# Altium PCB MotorsAdapter.PcbDoc
Units mil, origin at the board's own origin, x right, y up, seen from the top; angles counter-clockwise.
Board outline 6000 x 4000 mil, 2 copper layers (Top Layer, Bottom Layer); 10 components, 6 nets, 28 pads, 0 vias.
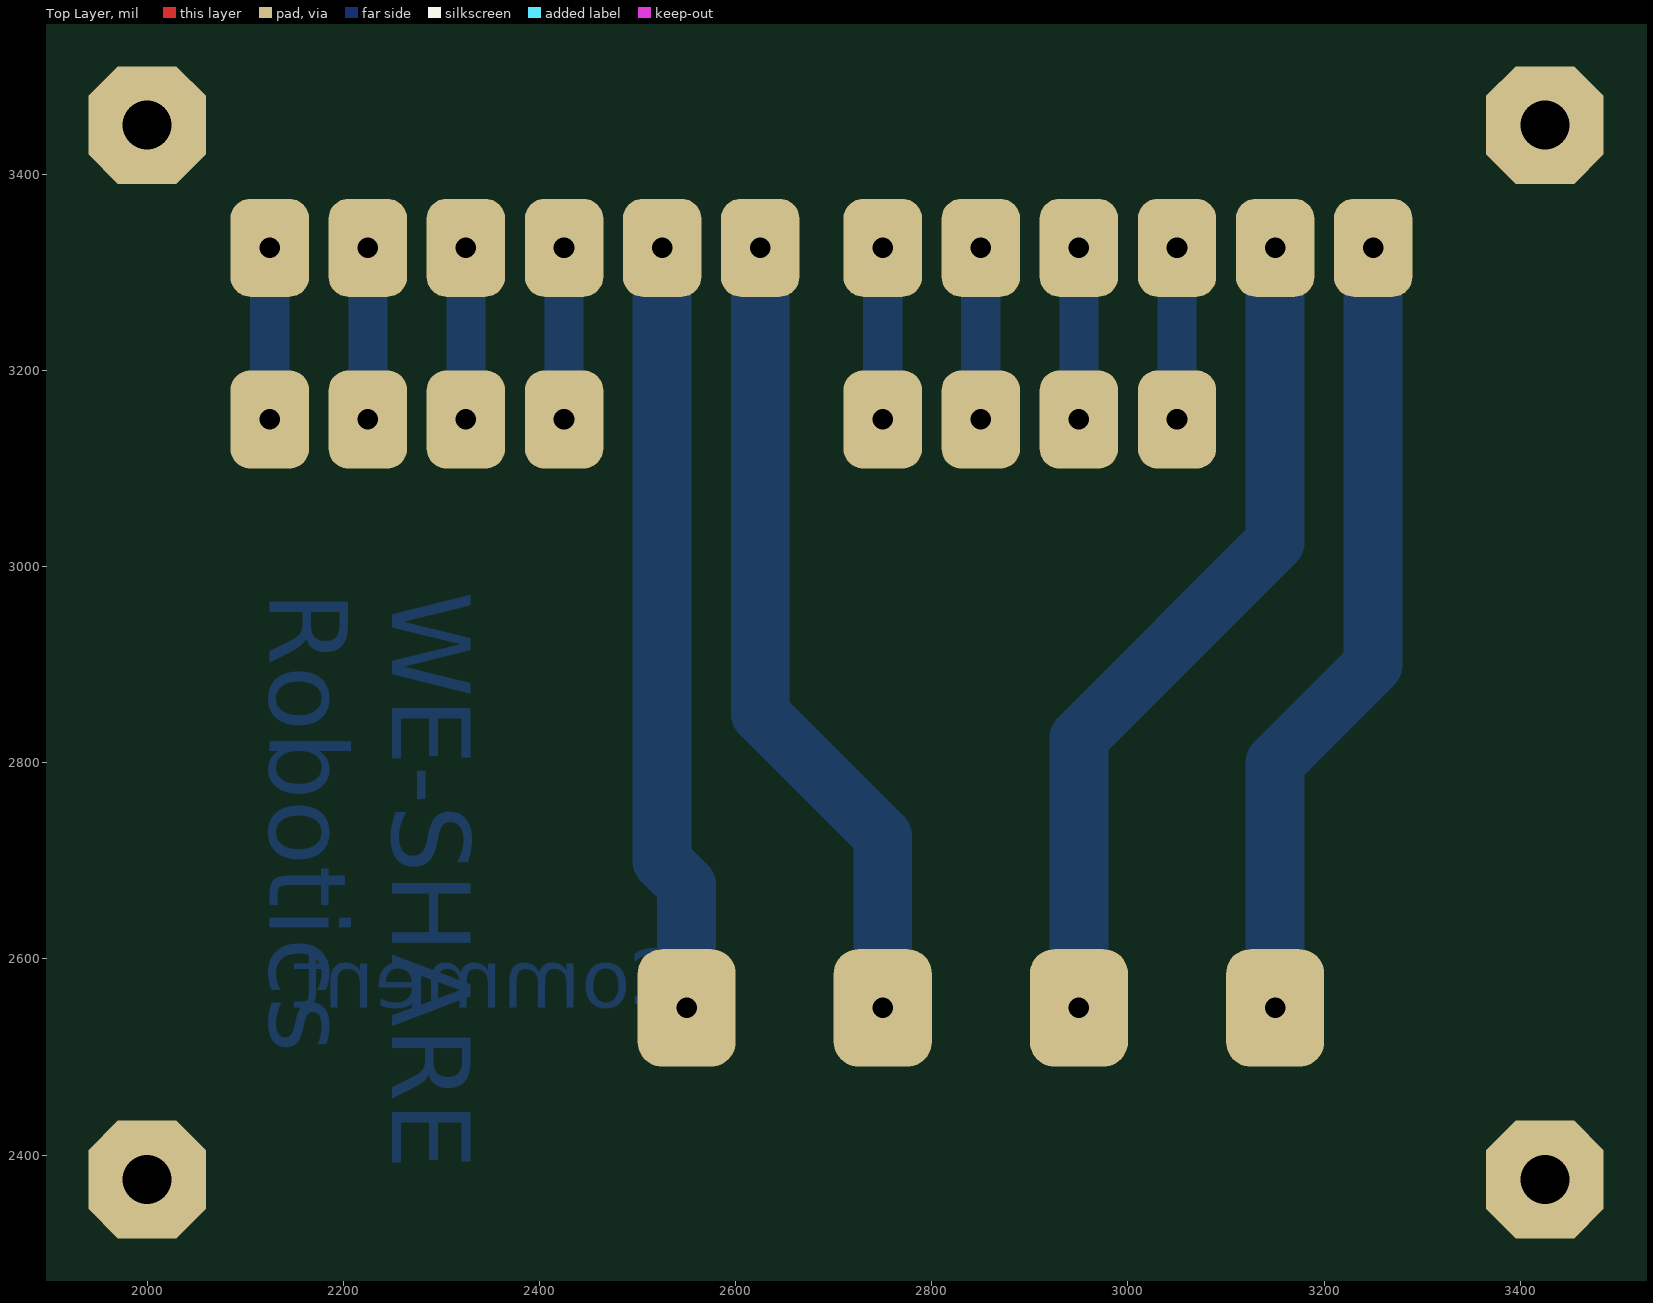
[diagram p0: Top Layer view]
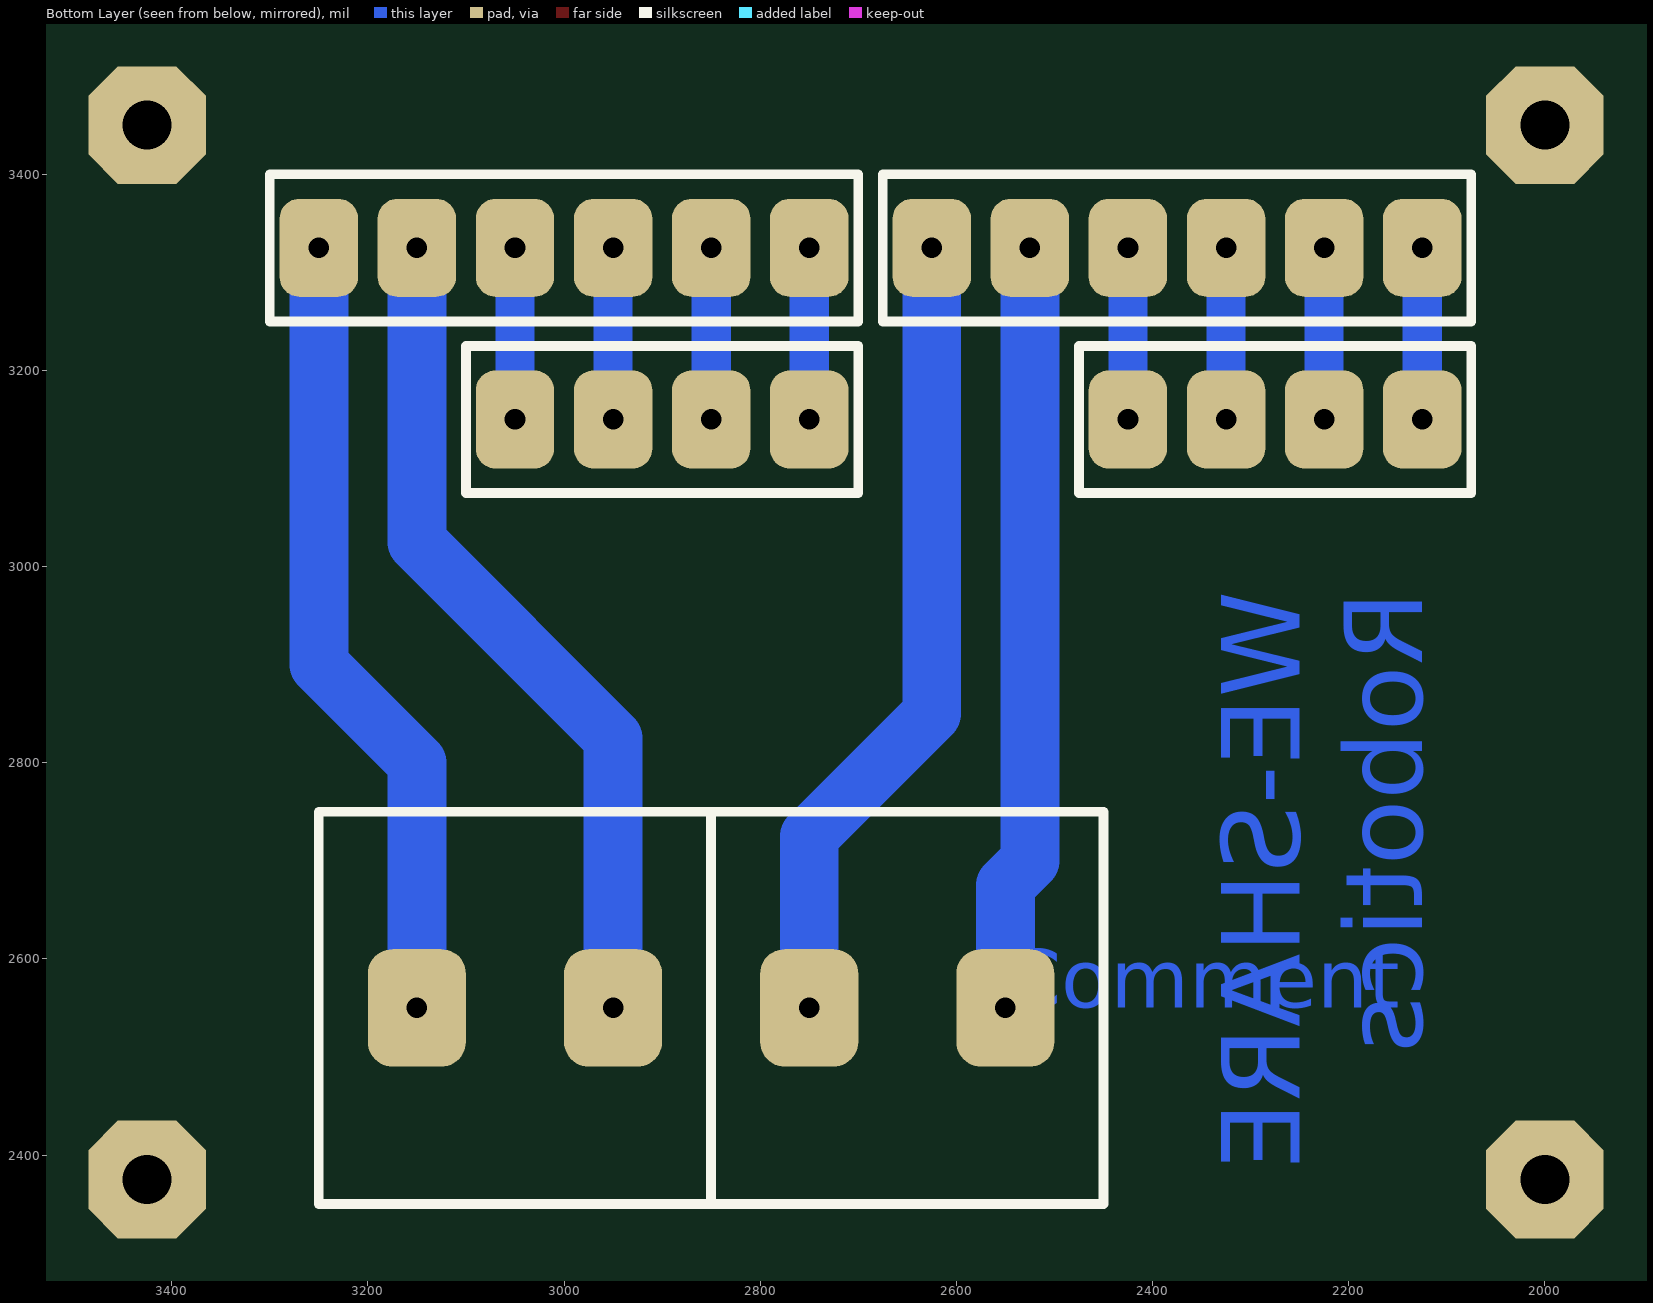
[diagram p1: Bottom Layer view, seen from below]

## Layer stack, top to bottom
Top Solder: solder mask 0.4, Solder Resist, Dk 3.5
Top Layer: signal copper 1.4
Dielectric 1: dielectric 12.6, FR-4, Dk 4.8
Bottom Layer: signal copper 1.4
Bottom Solder: solder mask 0.4, Solder Resist, Dk 3.5

## Board outline
1000,1000 7000,1000 7000,5000 1000,5000

## Design rules (kind name [scope] priority, off if disabled: settings)
Clearance [All] p1: gap=10
PolygonConnect [All] p1: connectstyle=Relief reliefconductorwidth=10 reliefentries=4 polygonreliefangle="90 Angle" airgapwidth=10
RoutingVias [All] p1: holewidth=28 width=50 viastyle="Through Hole" minholewidth=28 minwidth=50 maxholewidth=28 maxwidth=50
SolderMaskExpansion [All] p1: expansion=4
UnpouredPolygon [All] p1: allowunpoured=FALSE
Width [All] p1: maxlimit=10 minlimit=10 preferedwidth=10
29 further rules are at their usual default settings.

## Components (designator, comment, footprint, x,y, rotation, side; value= is the part's Value field where it differs from the comment)
? "Comment" klema 2950,2550 r0 bottom
? "Comment" klema 2550,2550 r0 bottom
? "Comment" SIP4 2750,3150 r0 bottom
? "Comment" SIP4 2125,3150 r0 bottom
? "Comment" SIP6 2750,3325 r0 bottom
? "Comment" SIP6 2125,3325 r0 bottom
? "Comment" SRAF 2000,3450 r0 bottom
? "Comment" SRAF 2000,2375 r0 bottom
? "Comment" SRAF 3425,2375 r0 bottom
? "Comment" SRAF 3425,3450 r0 bottom

## Footprints (in the part's own frame and the unit in brackets; to place one, negate y for a bottom-side part, rotate by r counter-clockwise, add the part's x,y. Pads: shape width x height; smd on the part's side, far side on the other; paste and mask are expansions set on the pad)
klema [mil]
  rrect50% 100x120 hole 21: 1(0,0) 2(200,0)
  silkscreen extent -100,-200 300,200
SIP4 [mil]
  rrect50% 80x100 hole 21: 1(0,0) 2(100,0) 3(200,0) 4(300,0)
  silkscreen extent -50,-75 350,75
SIP6 [mil]
  rrect50% 80x100 hole 21: 1(0,0) 2(100,0) 3(200,0) 4(300,0) 5(400,0) 6(500,0)
  silkscreen extent -50,-75 550,75
SRAF [mil]
  oct 120x120 hole 50: 0(0,0)

## Nets (pads, with @x,y where several pads share a name; then routed paths per layer and width w, separated by ;. In a path a pad name is that pad's centre, name@x,y a point inside that pad or via, vN(x,y) a via of type N, cw(c..) or ccw(c..) an arc to the next point about the centre after c; other vN are vias at no path point)
Net1_1: 
Net1_2: 
Net1_3: 
Net2_1: 
Net2_2: 
Net2_3: 
pads on no net: ?.0 ?.1 ?.2 ?.3 ?.4 ?.5 ?.6
copper on no net: | length 4686.4
  Bottom Layer w40: 2125,3150 2125,3325 ; 2225,3150 2225,3325 ; 2325,3150 2325,3325 ; 2425,3150 2425,3325 ; 2750,3150 2750,3325 ; 2850,3150 2850,3325 ; 2950,3150 2950,3325 ; 3050,3150 3050,3325
  Bottom Layer w60: 2525,3325 2525,2700 2550,2675 2550,2550 ; 2625,3325 2625,2850 2750,2725 2750,2550 ; 2950,2550 2950,2825 3150,3025 3150,3325 ; 3150,2550 3150,2800 3250,2900 3250,3325

## Other copper
Bottom Layer:
  text "Robotics" at 2125,2975 h80 r270
  text "WE-SHARE" at 2250,2975 h80 r270

## Silkscreen, mask and mechanical layers (free items; w line width, h text height)
Mechanical 1:
  lines w10: 1900,2275 3525,2275 3525,3550 1900,3550 1900,2275